# EAGLE board Qwiic-CO2_Sensor-SCD41 (EAGLE 9.6.2)
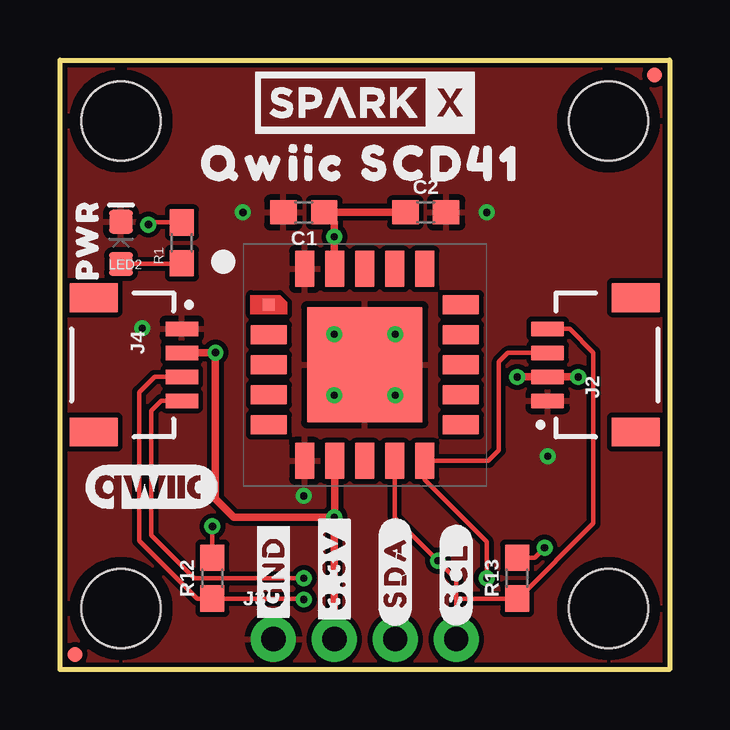
[diagram p0: board, top side]
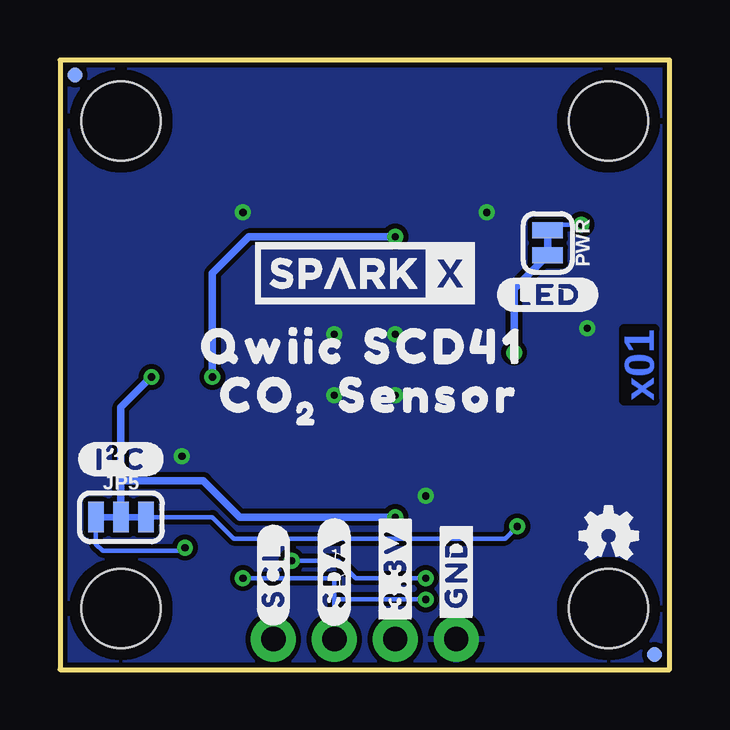
[diagram p1: board, bottom side, seen from below]

Size 25.4 x 25.4 mm. Coordinates in mm from the lower left corner, seen from the top.
Outline: 25.4,0 0,0 0,25.4 25.4,25.4 25.4,0
Copper layers (1*16): Top 0.035mm / dielectric 1.5mm / Bottom 0.035mm
Design rules "SparkFun-2-Layer-General-JLCPCB": minimum track width 7mil, minimum drill 0.3mm, track to track 7mil, track to pad 7mil, pad to pad 7mil, via to via 7mil, smd to smd 7mil, copper to edge 7mil, drill to drill 7mil, minimum pad ring 7mil, minimum via ring 7mil, stop-mask expansion 4mil, vias tented up to drill 25mil, thermal gap 10mil
Net classes: 1 power: width 0.178 mm; 2 3.3V: width 0.305 mm; 3 RF: width 0.35 mm, clearance 0.203 mm

## Footprints (pad centres in the part's own frame; a part is rotated, then mirrored left to right if it is on the bottom)
0603 = smd 1.1 x 1: 1 -0.85,0; 2 0.85,0
JST04_1MM_RA = smd 0.6 x 1.35: 1 -1.5,0; 2 -0.5,0; 3 0.5,0; 4 1.5,0 | smd 1.2 x 2: NC1 2.8,-3.675; NC2 -2.8,-3.675
1X04_NO_SILK = drill 1.016 pad 1.88: 1 0,0; 2 2.54,0; 3 5.08,0; 4 7.62,0
SMT-JUMPER_3_2-NC_TRACE_SILK = smd 0.66 x 1.27: 1 -1.041,0; 2 0,0; 3 1.041,0
MICRO-FIDUCIAL = smd 0.635 x 0.635: 1 0,0
STAND-OFF = hole 3.302: 0,0
LED-0603 = smd 1 x 1: A -0.877,0; C 0.877,0
SMT-JUMPER_2_NC_TRACE_SILK = smd 0.66 x 1.27: 1 -0.521,0; 2 0.521,0
SCD4X = smd 0.5 x 0.5: 1 -4,2.5 | smd 1.5 x 0.8: 2 -4,1.25; 3 -4,0; 4 -4,-1.25; 5 -4,-2.5; 11 4,-2.5; 12 4,-1.25; 13 4,0; 14 4,1.25; 15 4,2.5 | smd 0.8 x 1.5: 6 -2.5,-4; 7 -1.25,-4; 8 0,-4; 9 1.25,-4; 10 2.5,-4; 16 2.5,4; 17 1.25,4; 18 0,4; 19 -1.25,4; 20 -2.5,4 | smd 4.8 x 4.8: CP 0,0

## Placement (x,y rotation side)
C1  0.1uF  [0603]  10.16,19.05 180 top
C2  4.7uF  [0603]  15.24,19.05 0 top
FRAME1  FRAME-LETTER  [CREATIVE_COMMONS]  8.89,-17.78 0 top  (outside the outline)
J2  Qwiic Right Angle  [JST04_1MM_RA]  20.32,12.7 90 top
J3  PTH  [1X04_NO_SILK]  8.89,1.27 0 top
J4  Qwiic Right Angle  [JST04_1MM_RA]  5.08,12.7 270 top
JP5  [SMT-JUMPER_3_2-NC_TRACE_SILK]  22.86,6.35 0 bottom
JP21  FIDUCIALUFIDUCIAL  [MICRO-FIDUCIAL]  24.77,24.77 90 top
JP31  STAND-OFF  [STAND-OFF]  2.54,2.54 90 top
JP41  STAND-OFF  [STAND-OFF]  2.54,22.86 90 top
JP61  FIDUCIALUFIDUCIAL  [MICRO-FIDUCIAL]  0.64,0.64 90 top
JP71  FIDUCIALUFIDUCIAL  [MICRO-FIDUCIAL]  24.77,24.77 270 bottom
JP81  FIDUCIALUFIDUCIAL  [MICRO-FIDUCIAL]  0.64,0.64 270 bottom
JP91  STAND-OFF  [STAND-OFF]  22.86,2.54 90 top
JP101  STAND-OFF  [STAND-OFF]  22.86,22.86 90 top
LED2  RED  [LED-0603]  2.54,17.78 90 top
LOGO1  OSHW-LOGOMINI  [OSHW-LOGO-MINI]  2.54,5.59 0 bottom
PWR  [SMT-JUMPER_2_NC_TRACE_SILK]  5.08,17.78 270 bottom
R1  1k  [0603]  5.08,17.78 90 top
R12  2.2k  [0603]  6.35,3.81 90 top
R13  2.2k  [0603]  19.05,3.81 90 top
U3  SCD4X  [SCD4X]  12.7,12.7 0 top
U$1  [CO1]  17.14,11.43 0 bottom
U$3  [QWIIC0]  8.89,21.08 0 top
U$4  [QWIIC0]  16.51,13.46 0 bottom
U$5  SPARKX-LOGO4  [SPARKX-MEDIUM]  12.7,23.62 0 top
U$6  [#3#3V#0]  11.43,4.19 90 bottom
U$7  [#SDA#0]  13.97,4.06 90 bottom
U$8  [#SCL#0]  16.51,3.94 90 bottom
U$9  [#GND#0]  8.89,4.06 90 bottom
U$10  [#I�C#1]  22.86,8.76 0 bottom
U$12  [PWR0]  1.14,17.91 90 top
U$13  [SENSOR3]  10.03,11.43 0 bottom
U$14  [20]  15.11,10.67 0 bottom
U$15  [SCD410]  15.88,21.08 0 top
U$16  [SCD410]  9.4,13.46 0 bottom
U$23  [#LED#0]  5.08,15.62 0 bottom
U$33  [#GND#0]  8.89,4.06 90 top
U$34  [#3#3V#0]  11.43,4.19 90 top
U$35  [#SDA#0]  13.97,4.06 90 top
U$36  [#SCL#0]  16.51,3.94 90 top
U$38  SPARKX-LOGO4  [SPARKX-MEDIUM]  12.7,16.51 0 bottom
U$42  [QWIIC_5.5MM]  3.81,7.62 0 top

## Library data of the parts
C1 = SparkFun-Capacitors; PROD_ID: CAP-00810
C2 = SparkFun-Capacitors; PROD_ID: CAP-08280
FRAME1 LOGO1 U$42 = SparkFun-Aesthetics
J2 J4 = SparkFun-Connectors; PROD_ID: CONN-13694
J3 U$5 U$38 = SparkX
JP5 PWR = SparkFun-Jumpers
JP21 JP31 JP41 JP61 JP71 JP81 JP91 JP101 = SparkFun
LED2 = SparkFun-LED; PROD_ID: DIO-00819
R1 = SparkFun-Resistors; PROD_ID: RES-07856
R12 R13 = SparkFun-Resistors; PROD_ID: RES-08272
U3 = NewParts
U$1 U$3 U$4 U$6-U$10 U$12-U$16 U$23 U$33-U$36 = output

## Nets
3.3V [3.3V]: C1.1 C2.1 J2.2 J3.2 J4.2 JP5.2 PWR.2 U3.7 U3.19
GND: C1.2 C2.2 J2.1 J3.1 J4.1 LED2.C U3.6 U3.20 U3.CP
N$9: JP5.1 R13.2
N$10: LED2.A R1.1
N$15: JP5.3 R12.2
N$17: PWR.1 R1.2
SCL: J2.4 J3.4 J4.4 R13.1 U3.9
SDA: J2.3 J3.3 J4.3 R12.1 U3.10

## Tracks (layer width: path | path; a pad name or v marks a point on that pad's centre or on a via)
3.3V  (via drill 0.3)
  Top 0.305: J4.2 v6.47,13.2 v6.48,13.21 6.48,7.11 7.24,6.35 v11.43,6.35 | v19.05,12.19 J2.2 v21.58,12.2 v21.59,12.19 | U3.7 11.45,6.37 v11.43,6.35 | J3.2 v11.43,6.35 | C2.1 C1.1 11.43,18.63 v11.43,18.03 11.43,16.72 U3.19
  Bottom 0.305: v11.43,18.03 17.53,18.03 19.05,16.51 v19.05,12.19 | JP5.2 22.86,7.87 | 22.86,7.87 22.86,10.92 v21.59,12.19 | 22.86,7.87 19.43,7.87 17.91,6.35 v11.43,6.35 | v6.48,13.21 6.48,15.86 PWR.2
GND  (via drill 0.3)
  other vias: 3.43,14.22 10.16,7.24 11.43,13.97 13.97,13.97 13.97,11.43 11.43,11.43 20.32,8.89 7.62,19.05 17.78,19.05
  pour Top (isolate 0.203, rank 4): 0,0 0,25.4 25.4,25.4 25.4,0
  pour Bottom (isolate 0.203, rank 4): 0,0 0,25.4 25.4,25.4 25.4,0
N$9  (via drill 0.3)
  Top 0.178: v20.19,5.08 19.77,4.66 R13.2
  Bottom 0.178: JP5.1 23.9,5.23 23.62,4.95 20.32,4.95 v20.19,5.08
N$10
  Top 0.178: LED2.A 5.05,16.9 R1.1
N$15  (via drill 0.3)
  Top 0.178: v6.35,5.97 R12.2
  Bottom 0.178: JP5.3 19.05,6.35 18.16,5.46 6.86,5.46 v6.35,5.97
N$17  (via drill 0.3)
  Top 0.178: R1.2 3.77,18.63 v3.68,18.54
  Bottom 0.178: v3.68,18.54 4.84,18.54 PWR.1
SCL  (via drill 0.3)
  Top 0.178: J3.4 16.51,2.92 | J4.4 4.21,11.2 3.81,10.79 3.81,5.59 5.59,3.81 v10.16,3.81 | 16.51,2.92 16.55,2.96 R13.1 19.09,2.96 22.23,6.1 22.23,13.21 21.23,14.2 J2.4 | U3.9 13.95,6.33 v15.75,4.53 16.51,3.77 16.51,2.92
  Bottom 0.178: v15.75,4.53 13.81,4.53 13.09,3.81 v10.16,3.81
SDA  (via drill 0.3)
  Top 0.178: v17.78,3.81 17.78,5.33 15.2,7.91 U3.10 17.84,8.7 18.29,9.14 18.29,12.83 18.66,13.2 J2.3 | v10.16,2.92 10.12,2.96 R12.1 5.71,2.96 3.3,5.37 3.3,11.56 3.94,12.2 J4.3
  Bottom 0.178: v17.78,3.81 13.97,3.81 13.97,2.92 | 13.97,2.92 J3.3 | v10.16,2.92 13.97,2.92

## Text on the board
Bottom: x01
Measures: Measurements in inches